# EAGLE board RingLightV2.0 (EAGLE 7.2.0)
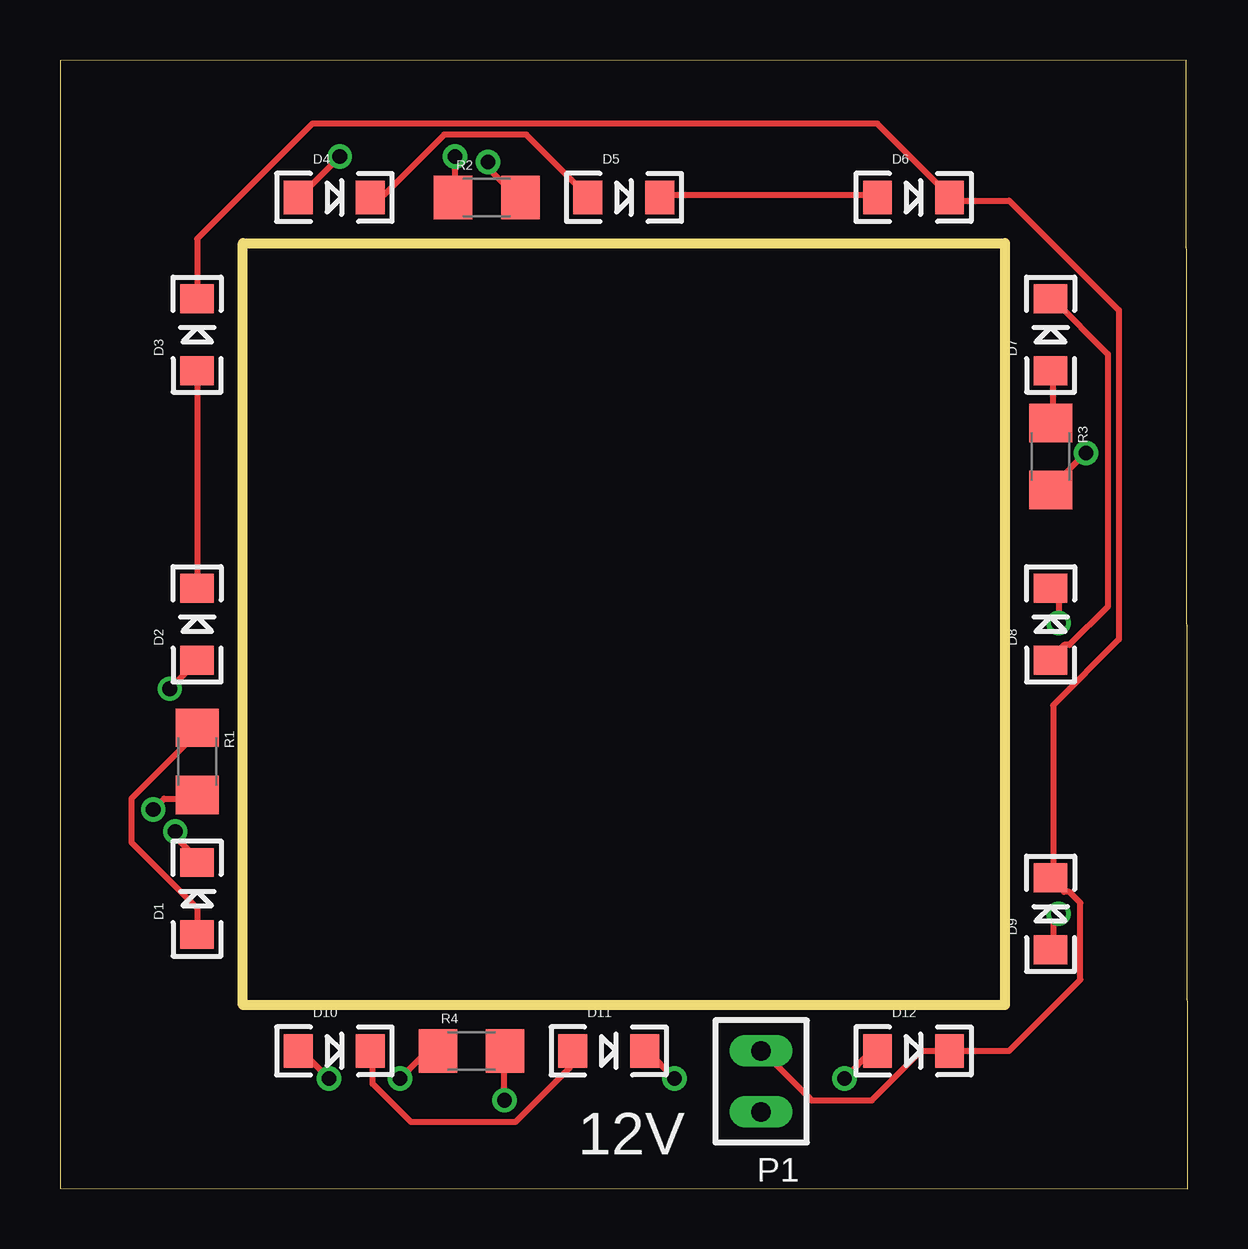
[diagram p0: board, top side]
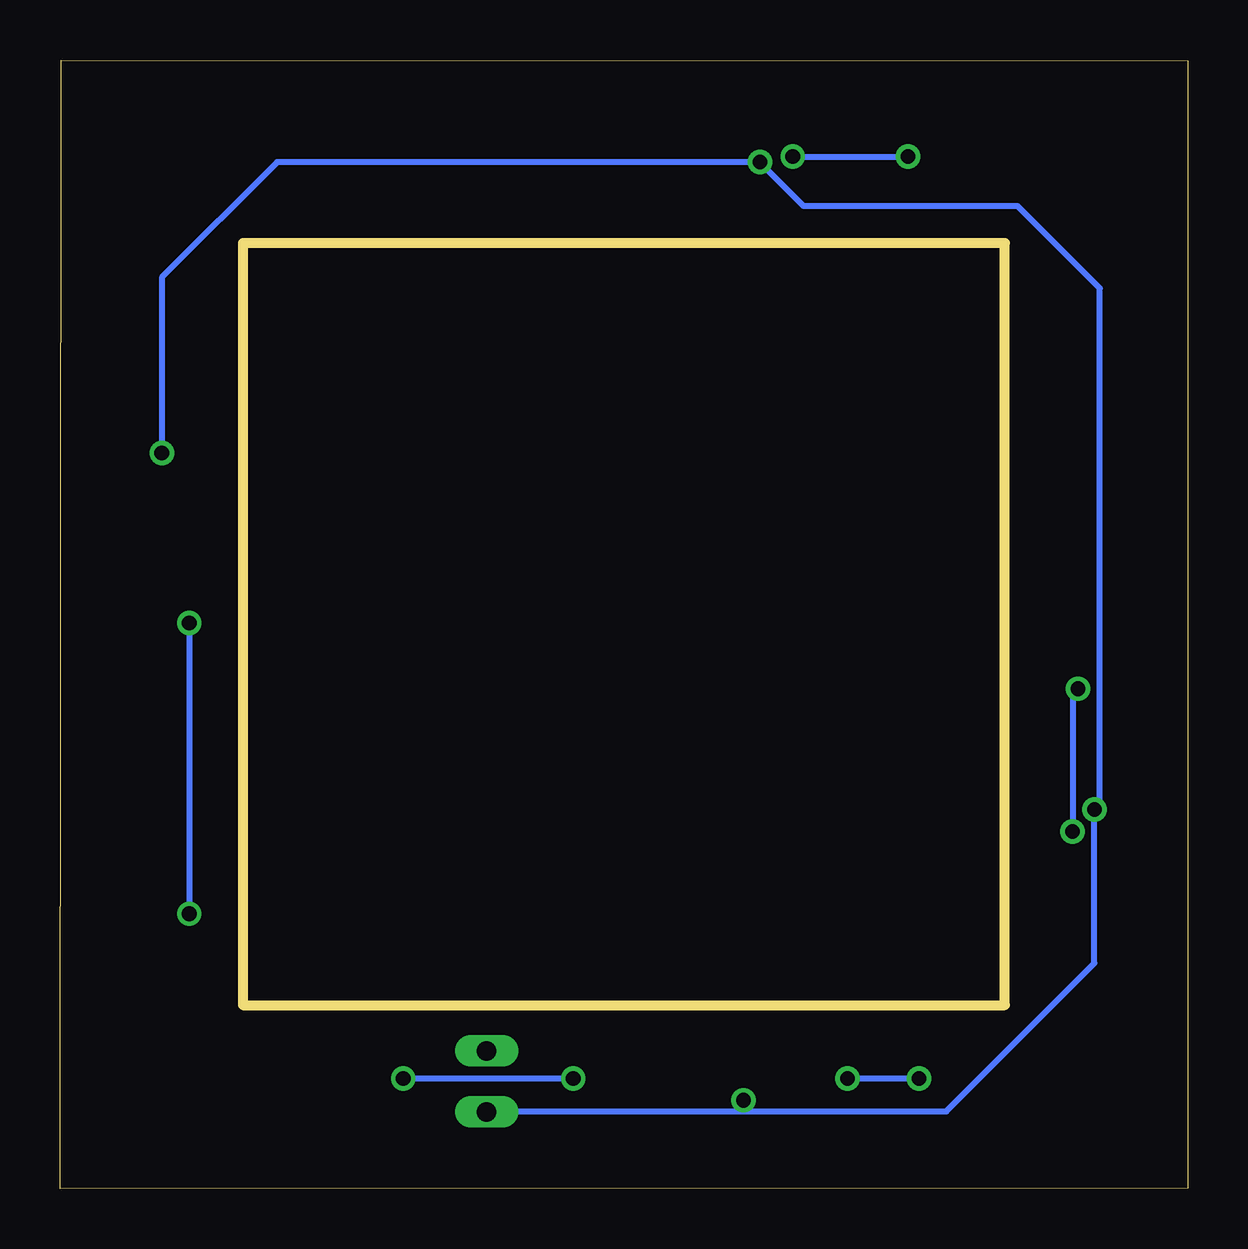
[diagram p1: board, bottom side, seen from below]

Size 46.99 x 47.03 mm. Coordinates in mm from the lower left corner, seen from the top.
Outline: 0,0.03 46.99,0 46.93,47.03 0,47.01 0,0.03
Copper layers (1*16): Top 0.035mm / dielectric 1.5mm / Bottom 0.035mm
Design rules "default": minimum track width 10mil, minimum drill 24mil, track to track 8mil, track to pad 8mil, pad to pad 8mil, via to via 8mil, smd to smd 8mil, copper to edge 40mil, drill to drill 8mil, minimum pad ring 10mil, minimum via ring 8mil, stop-mask expansion 4mil, vias tented up to drill 0mil, thermal gap 10mil

## Footprints (pad centres in the part's own frame; a part is rotated, then mirrored left to right if it is on the bottom)
LED-1206 = smd 1.2 x 1.4: A -1.5,0; C 1.5,0
SIP-100-02-32Y = drill 0.813 long: 1 -1.27,0; 2 1.27,0
1206 = smd 1.6 x 1.8: 1 -1.4,0; 2 1.4,0

## Placement (x,y rotation side)
D1  [LED-1206]  5.71,12.09 90 top
D2  [LED-1206]  5.71,23.52 90 top
D3  [LED-1206]  5.71,35.59 90 top
D4  [LED-1206]  11.43,41.3 0 top
D5  [LED-1206]  23.5,41.3 0 top
D6  [LED-1206]  35.56,41.3 0 top
D7  [LED-1206]  41.27,35.59 90 top
D8  [LED-1206]  41.27,23.52 90 top
D9  [LED-1206]  41.27,11.46 90 top
D10  [LED-1206]  11.43,5.74 0 top
D11  [LED-1206]  22.86,5.74 0 top
D12  [LED-1206]  35.56,5.74 0 top
P1  M-1X02-SIP-100-32Y  [SIP-100-02-32Y]  29.21,4.47 90 top
R1  90  [1206]  5.71,17.81 270 top
R2  90  [1206]  17.78,41.3 0 top
R3  90  [1206]  41.27,30.51 270 top
R4  90  [1206]  17.14,5.74 0 top

## Library data of the parts
D1-D12 = SparkFun-LED
P1 = con-headers-jp
R1-R4 = SparkFun-Passives

## Nets
GND: D3.C D6.C D9.C D12.C P1.2
N$1: D1.A R1.1
N$2: D4.A R2.1
N$3: D7.A R3.1
N$4: D10.A R4.1
N$5: D1.C D2.A
N$6: D4.C D5.A
N$7: D7.C D8.A
N$8: D10.C D11.A
N$9: D11.C D12.A
N$10: D8.C D9.A
N$11: D5.C D6.A
N$12: D2.C D3.A
VCC: P1.1 R1.2 R2.2 R3.2 R4.2

## Tracks (layer width: path | path; a pad name or v marks a point on that pad's centre or on a via)
GND
  Top 0.254: P1.2 29.26,5.74 31.32,3.69 33.83,3.69 35.89,5.74 D12.C 39.55,5.74 42.52,8.71 42.52,11.91 42.06,12.37 41.83,12.37 41.38,12.83 D9.C 41.38,13.06 41.38,20.14 44.12,22.89 44.12,36.6 39.55,41.18 37.26,41.18 D6.C 37.03,41.4 34.06,44.38 10.52,44.38 5.71,39.58 D3.C
N$1
  Top 0.254: D1.A 5.71,11.69 2.97,14.43 2.97,16.26 5.71,19 R1.1
N$2  (via drill 0.61)
  Top 0.254: v11.66,43 10.06,41.4 D4.A | v16.46,43 16.46,41.4 R2.1
  Bottom 0.254: v16.46,43 v11.66,43
N$3
  Top 0.254: D7.A 41.38,33.86 41.38,32.03 R3.1
N$4  (via drill 0.61)
  Top 0.254: v11.2,4.6 10.06,5.74 D10.A | v14.17,4.6 15.32,5.74 R4.1
  Bottom 0.254: v14.17,4.6 v11.2,4.6
N$5  (via drill 0.61)
  Top 0.254: v4.8,14.89 4.8,14.66 5.71,13.74 D1.C | v4.57,20.83 5.71,21.97 D2.A
  Bottom 0.254: v4.8,14.89 4.8,20.6 v4.57,20.83
N$6
  Top 0.254: D4.C 13.03,41.4 13.49,41.4 16,43.92 19.43,43.92 21.95,41.4 D5.A
N$7
  Top 0.254: D8.A 41.38,22.2 41.83,22.66 42.06,22.66 43.66,24.26 43.66,34.77 41.38,37.06 D7.C
N$8
  Top 0.254: D10.C 13.03,5.74 13.03,4.37 14.63,2.77 18.97,2.77 21.26,5.06 21.26,5.74 D11.A
N$9  (via drill 0.61)
  Top 0.254: v25.6,4.6 24.46,5.74 D11.C | v32.69,4.6 33.83,5.74 D12.A
  Bottom 0.254: v32.69,4.6 v25.6,4.6
N$10  (via drill 0.61)
  Top 0.254: v41.6,11.46 41.38,11.23 41.38,10.09 D9.A | v41.6,23.57 41.6,24.72 41.38,24.94 D8.C
  Bottom 0.254: v41.6,23.57 v41.6,11.46
N$11
  Top 0.254: D5.C 25.15,41.4 33.83,41.4 D6.A
N$12
  Top 0.254: D3.A D2.C
VCC  (via drill 0.61)
  Top 0.254: v3.89,15.8 4.34,16.26 5.71,16.26 R1.2 | v18.52,3.69 18.52,5.74 R4.2 | v17.83,42.78 17.83,42.55 18.97,41.4 R2.2 | v42.75,30.66 41.38,29.29 R3.2
  Bottom 0.254: 18.52,3.23 29.03,3.23 P1.1 | 18.52,3.23 10.06,3.23 3.89,9.4 v3.89,15.8 3.66,16.03 3.66,37.52 7.09,40.95 16,40.95 v17.83,42.78 37.95,42.78 42.75,37.98 v42.75,30.66 | 18.52,3.23 v18.52,3.69

## Text on the board
tPlace: 12V